# EAGLE board relay (EAGLE 5.06)
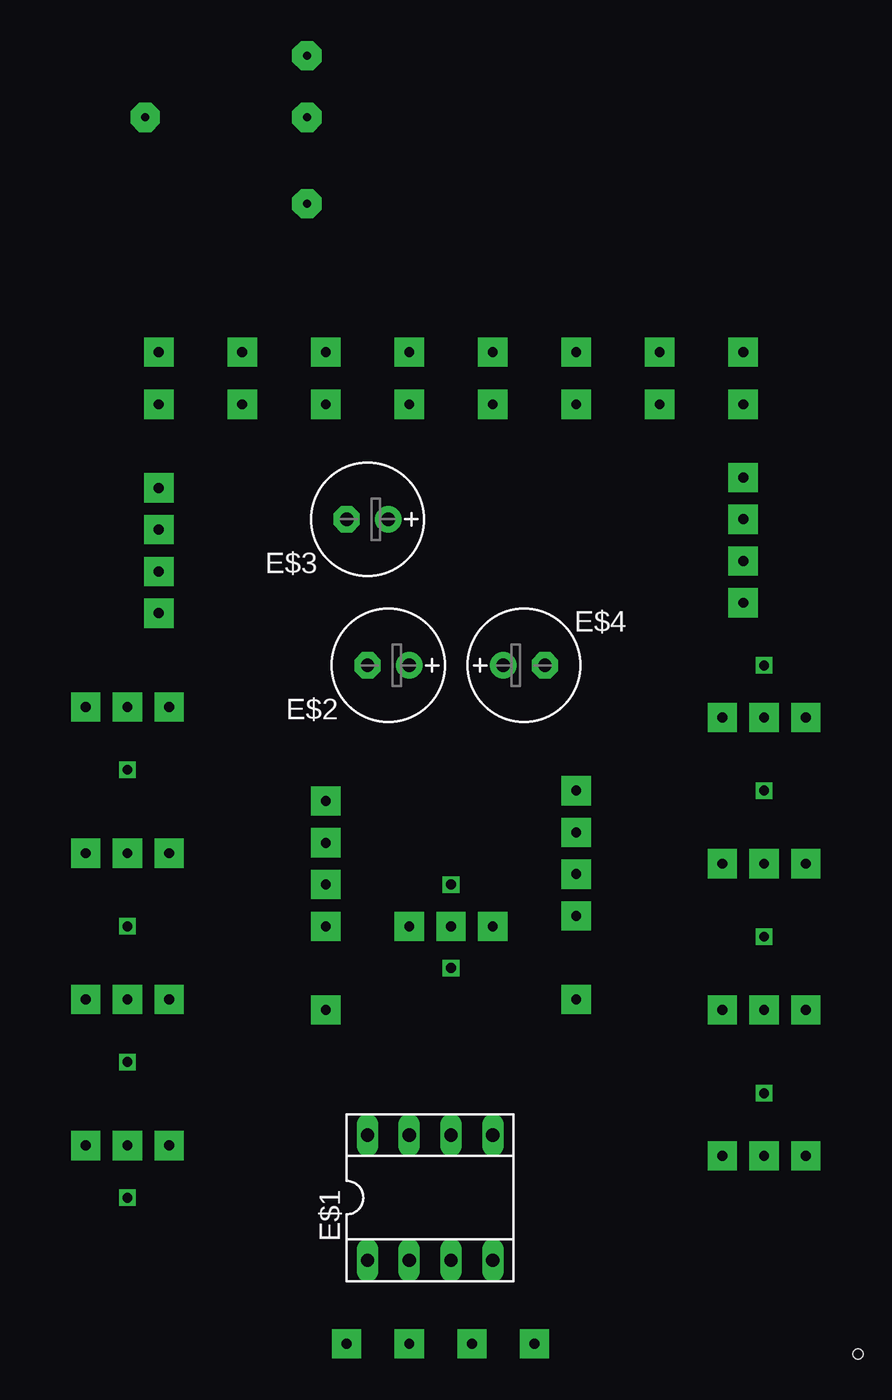
[diagram p0: board, top side]
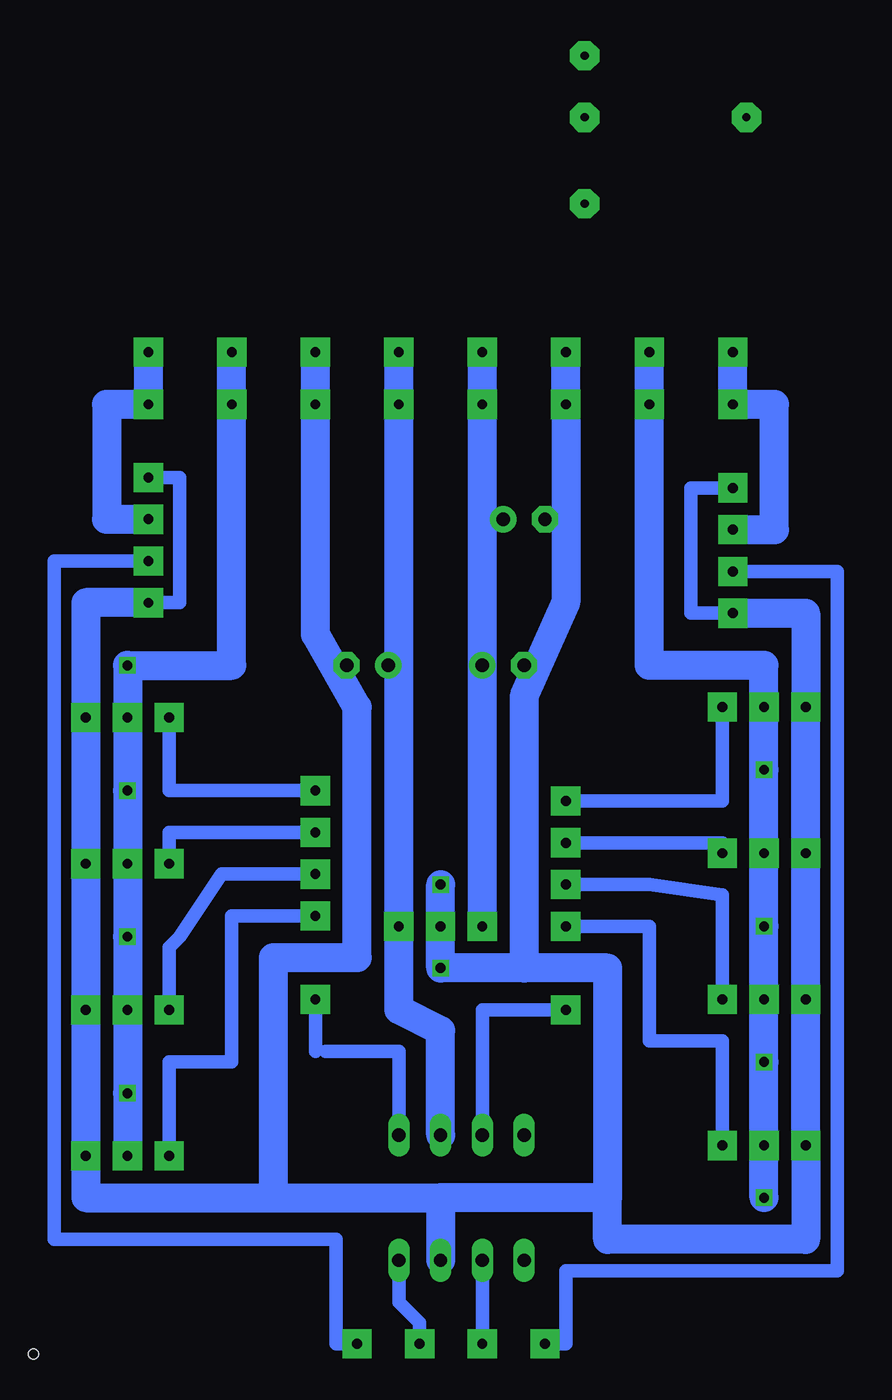
[diagram p1: board, bottom side, seen from below]

No outline drawn. Coordinates in mm, seen from the top.
Copper layers (1*16): Top 0.035mm / dielectric 1.5mm / Bottom 0.035mm
Design rules "default": minimum track width 10mil, minimum drill 24mil, track to track 8mil, track to pad 8mil, pad to pad 8mil, via to via 8mil, smd to smd 8mil, copper to edge 40mil, drill to drill 8mil, minimum pad ring 10mil, minimum via ring 8mil, stop-mask expansion 4mil, vias tented up to drill 0mil, thermal gap 10mil
Holes 0.6 mm at 49.53,0

## Footprints (pad centres in the part's own frame; a part is rotated, then mirrored left to right if it is on the bottom)
SOCKET-08 = drill 0.813 long: 1 -3.81,-3.81; 2 -1.27,-3.81; 3 1.27,-3.81; 4 3.81,-3.81; 5 3.81,3.81; 6 1.27,3.81; 7 -1.27,3.81; 8 -3.81,3.81
E2,5-7 = drill 0.813 pad 1.6 round: + -1.27,0 | drill 0.813 pad 1.6 octagon: - 1.27,0

## Placement (x,y rotation side)
E$1  [SOCKET-08]  23.5,9.53 0 top
E$2  [E2,5-7]  20.95,41.91 180 top
E$3  [E2,5-7]  19.68,50.8 180 top
E$4  [E2,5-7]  29.21,41.91 0 top

## Library data of the parts
E$1 = ic-package
E$2-E$4 = rcl

## Nets
S$7: E$1.6
S$16: E$1.7
S$18: E$1.3
S$28: E$1.5
S$37: E$1.2
S$39: E$1.4

## Tracks (layer width: path | path; a pad name or v marks a point on that pad's centre or on a via)
S$1  (via drill 0.5 pad 1.78)
  other vias: 16,75.25
S$2  (via drill 0.6, 0.6 pad 1.78)
  Bottom 1.778: v12.06,60.96 v12.06,57.78 12.06,41.91 5.08,41.91 v5.08,39.37 v5.08,35.56 v5.08,26.04 v5.08,17.78 v5.08,12.7 5.08,9.53
S$3  (via drill 0.6 pad 1.78)
  Bottom 0.813: v7.62,12.7 7.62,19.05 12.06,19.05 12.06,26.04 v17.14,26.04
S$4  (via drill 0.6 pad 1.78)
  Bottom 0.813: v18.41,0.64 17.14,0.64 17.14,5.08 0.64,5.08 0.64,47.62 v6.99,47.62
S$5  (via drill 0.6 pad 1.78)
  other vias: 5.08,21.59
S$6  (via drill 0.6 pad 1.78)
  Bottom 0.813: v7.62,21.59 7.62,27.94 12.06,28.57 v17.14,28.57
S$7  (via drill 0.6 pad 1.78)
  Bottom 1.778: E$1.6 24.77,19.68 27.3,20.95 v27.3,26.04 v27.3,57.78 v27.3,60.96
S$8  (via drill 0.6 pad 1.78)
  other vias: 5.08,30.48
S$9  (via drill 0.5 pad 1.78)
  other vias: 16,70
S$10  (via drill 0.6 pad 1.78)
  Bottom 0.813: v42.55,48.26 48.26,48.26 48.26,6.99 31.11,6.99 31.11,0.64 v29.84,0.64
S$11  (via drill 0.5 pad 1.78)
  other vias: 16,79
S$12  (via drill 0.6 pad 1.78)
  Bottom 0.813: v7.62,39.37 7.62,33.66 v17.14,33.66
S$13  (via drill 0.5 pad 1.78)
  other vias: 6.15,75.25
S$14  (via drill 0.6 pad 1.78)
  other vias: 2.54,21.59
S$15  (via drill 0.6 pad 1.78)
  Bottom 1.778: v22.23,26.04 v22.23,57.78 v22.23,60.96
S$16  (via drill 0.6 pad 1.78)
  Bottom 0.813: v17.14,20.95 22.23,20.95 E$1.7
S$17  (via drill 0.6 pad 1.78)
  other vias: 43.81,20.95
S$18  (via drill 0.6, 0.6 pad 1.78)
  Bottom 0.813: v42.55,53.34 40.64,53.34 40.64,45.72 v42.55,45.72 | v6.99,52.7 9.53,52.7 9.53,45.09 v6.99,45.09
  Bottom 1.778: 19.68,23.5 19.68,40.01 17.14,45.72 v17.14,57.78 v17.14,60.96 | v42.55,45.72 46.35,45.72 v46.35,38.73 v46.35,12.06 46.35,9.53 34.92,9.53 | v6.99,45.09 2.54,45.09 v2.54,39.37 v2.54,12.7 2.54,6.99 14.61,6.99 14.61,9.53 | 14.61,9.53 24.77,9.53 | 24.77,9.53 E$1.3 | 34.92,9.53 24.77,9.53 | 34.92,9.53 34.92,24.13 29.84,24.13 29.84,39.37 32.38,43.81 v32.38,57.78 v32.38,60.96 | 14.61,9.53 14.61,23.5 19.68,23.5 | 19.68,23.5 v24.77,23.5 v24.77,26.04 v24.77,28.57
S$19  (via drill 0.6 pad 1.78)
  Bottom 0.813: v41.27,29.84 41.27,31.75 v32.38,31.75
S$20  (via drill 0.6 pad 1.78)
  other vias: 43.81,29.84
S$22  (via drill 0.6 pad 1.78)
  Bottom 0.813: v41.27,38.73 41.27,34.29 v32.38,34.29
S$23  (via drill 0.6, 0.6 pad 1.78)
  Bottom 1.778: v43.81,12.06 v43.81,15.88 v43.81,25.4 v43.81,34.29 v43.81,38.73 43.81,41.91 37.47,41.91 v37.47,57.78 v37.47,60.96
S$25  (via drill 0.6 pad 1.78)
  other vias: 2.54,30.48
S$28  (via drill 0.6 pad 1.78)
  Bottom 0.406: 31.75,18.41 32.38,18.41
  Bottom 0.813: E$1.5 27.3,18.41 31.75,18.41 | 32.38,18.41 v32.38,21.59
S$29  (via drill 0.6)
  other vias: 43.81,41.91
S$30  (via drill 0.6 pad 1.78)
  other vias: 46.35,20.95
S$31  (via drill 0.6 pad 1.78)
  Bottom 0.813: v32.38,26.67 37.47,26.67 37.47,17.78 41.27,17.78 v41.27,12.06
S$32  (via drill 0.6 pad 1.78)
  Bottom 1.778: v6.99,50.16 4.45,50.16 4.45,57.78 v6.99,57.78 v6.99,60.96
S$33  (via drill 0.6)
  other vias: 5.08,9.53
S$34  (via drill 0.6 pad 1.78)
  Bottom 1.778: v42.55,50.8 45.09,50.8 45.09,57.78 v42.55,57.78 v42.55,60.96
S$37  (via drill 0.6 pad 1.78)
  Bottom 0.813: E$1.2 v22.23,0.64
S$39  (via drill 0.6 pad 1.78)
  Bottom 0.813: E$1.4 27.3,3.17 26.04,1.91 v26.04,0.64
S$46  (via drill 0.6 pad 1.78)
  Bottom 0.813: v17.14,31.11 7.62,31.11 v7.62,30.48
S$49  (via drill 0.6 pad 1.78)
  other vias: 46.35,29.84
S$50  (via drill 0.6 pad 1.78)
  Bottom 0.813: v32.38,29.21 38.1,29.21 40.64,25.4 41.27,24.77 v41.27,20.95